# Altium PCB LNA.PcbDoc (part 2 of 2)
Units mm, origin at the board's own origin, x right, y up, seen from the top; angles counter-clockwise.
Board outline 50 x 50 mm, 4 copper layers (Top Layer, Layer 2, Layer 3, Bottom Layer), stack 1.513 mm thick; 82 components, 39 nets, 181 pads, 185 vias.
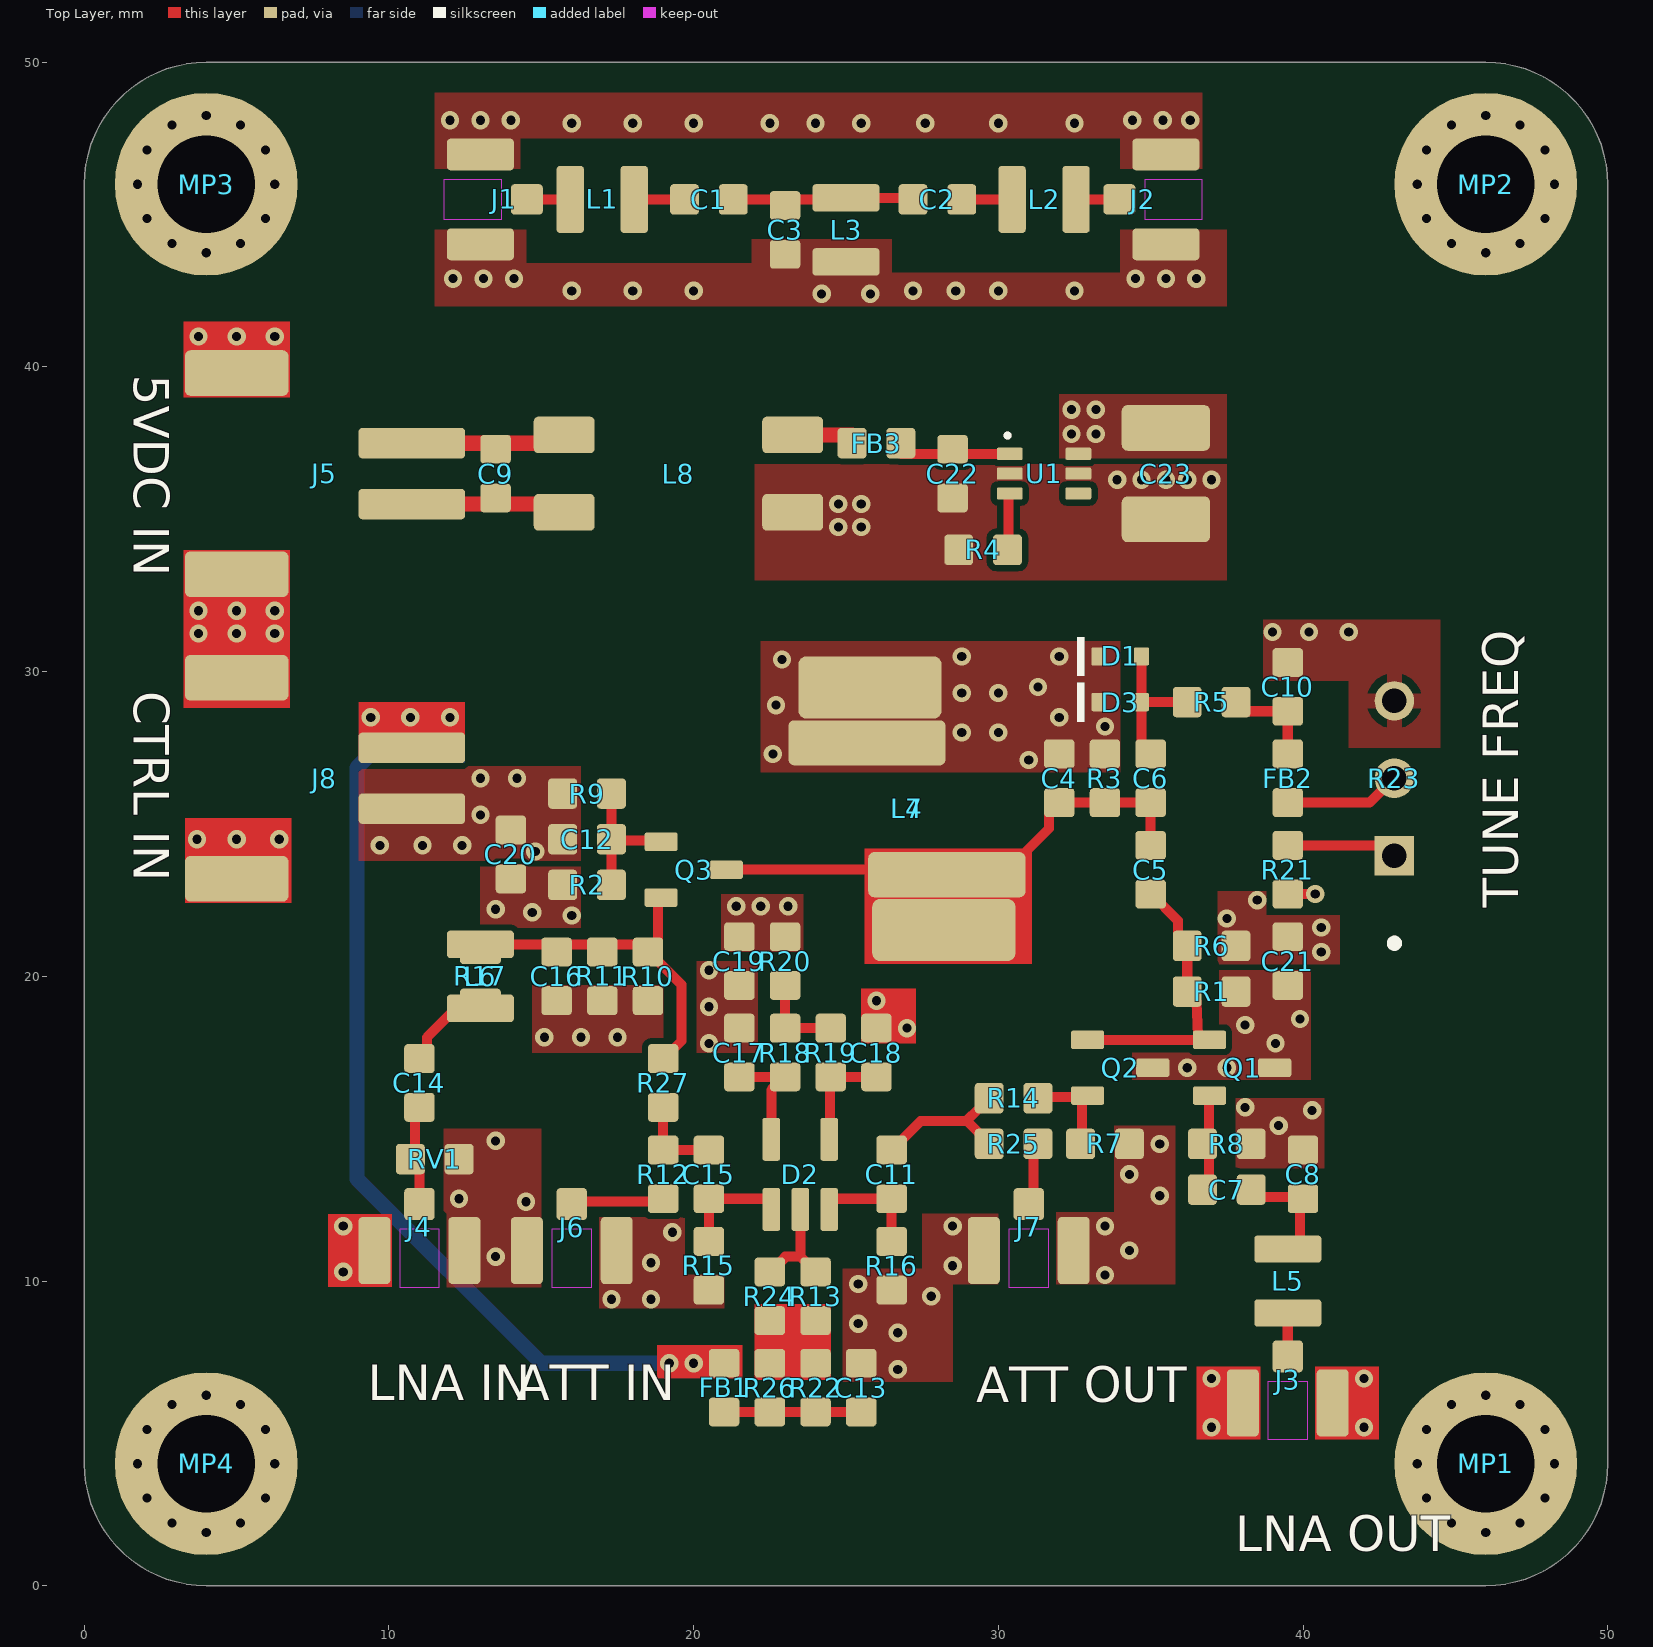
[diagram p0: Top Layer view]

## Silkscreen, mask and mechanical layers (free items; w line width, h text height) (continued)
Fab Notes: (continued)
  text "4" at 61.917,51.03 h2
  text "Bottom Layer" at 70.338,51.03 h2
  text "CF-004" at 87,51.03 h2
  text "0.035mm" at 98.216,51.03 h2
  text "Bottom Solder" at 70.338,47.03 h2
  text "SM-001" at 87,47.03 h2
  text "0.025mm" at 98.216,47.03 h2
  text "4" at 109.509,47.03 h2
  text "Bottom Overlay" at 70.338,43.03 h2
  text "1. Layer count : .Layer_Count / 2. Dimensions : .Board_Width x .Board_Height / 3. PCB Thickness : .Total_Thickness / 4. PCB Color : green / 5. Silkscreen : white / 6. Material type : >=FR4-TG155 / 7. Surface finish : Pb-free HASL / 8. Gold thickness : 1U\" / 9. Outer copper weight : 1oz / 10. Inner copper weight : 0.5oz / 11. Impedance control : No / 12. Layer stackup : JLC04161H-7628 / 13. Via covering : Tented / 14. Minimum hole size : .Hole_Size_Min / 15. Board outline tolerance : +/- 0.2mm / 16. Mark on PCB : 2D bardcode & Number | Data Matrix Code | .board_name _ABCDE_0001 | 8x8mm / 17. Gold fingers : No / 18. Castellated holes : No / 19. Press-fit holes : No / 20. Edge plating : No / 21. Hole count : .Hole_Count / 22. SMD solder joints : .PadSMD_Count / 23. Through-hole solder joints : .PadThru_Count" at 60,0.531 h2